# Altium PCB the89C52-PCB-Designer_4.8-Gakenn.PcbDoc
Units mil, origin at the board's own origin, x right, y up, seen from the top; angles counter-clockwise.
Board outline 3936.26 x 3936.26 mil, 2 copper layers (Top Layer, Bottom Layer); 97 components, 95 nets, 373 pads, 50 vias.
Unrouted connection lines stored in the file: 1.
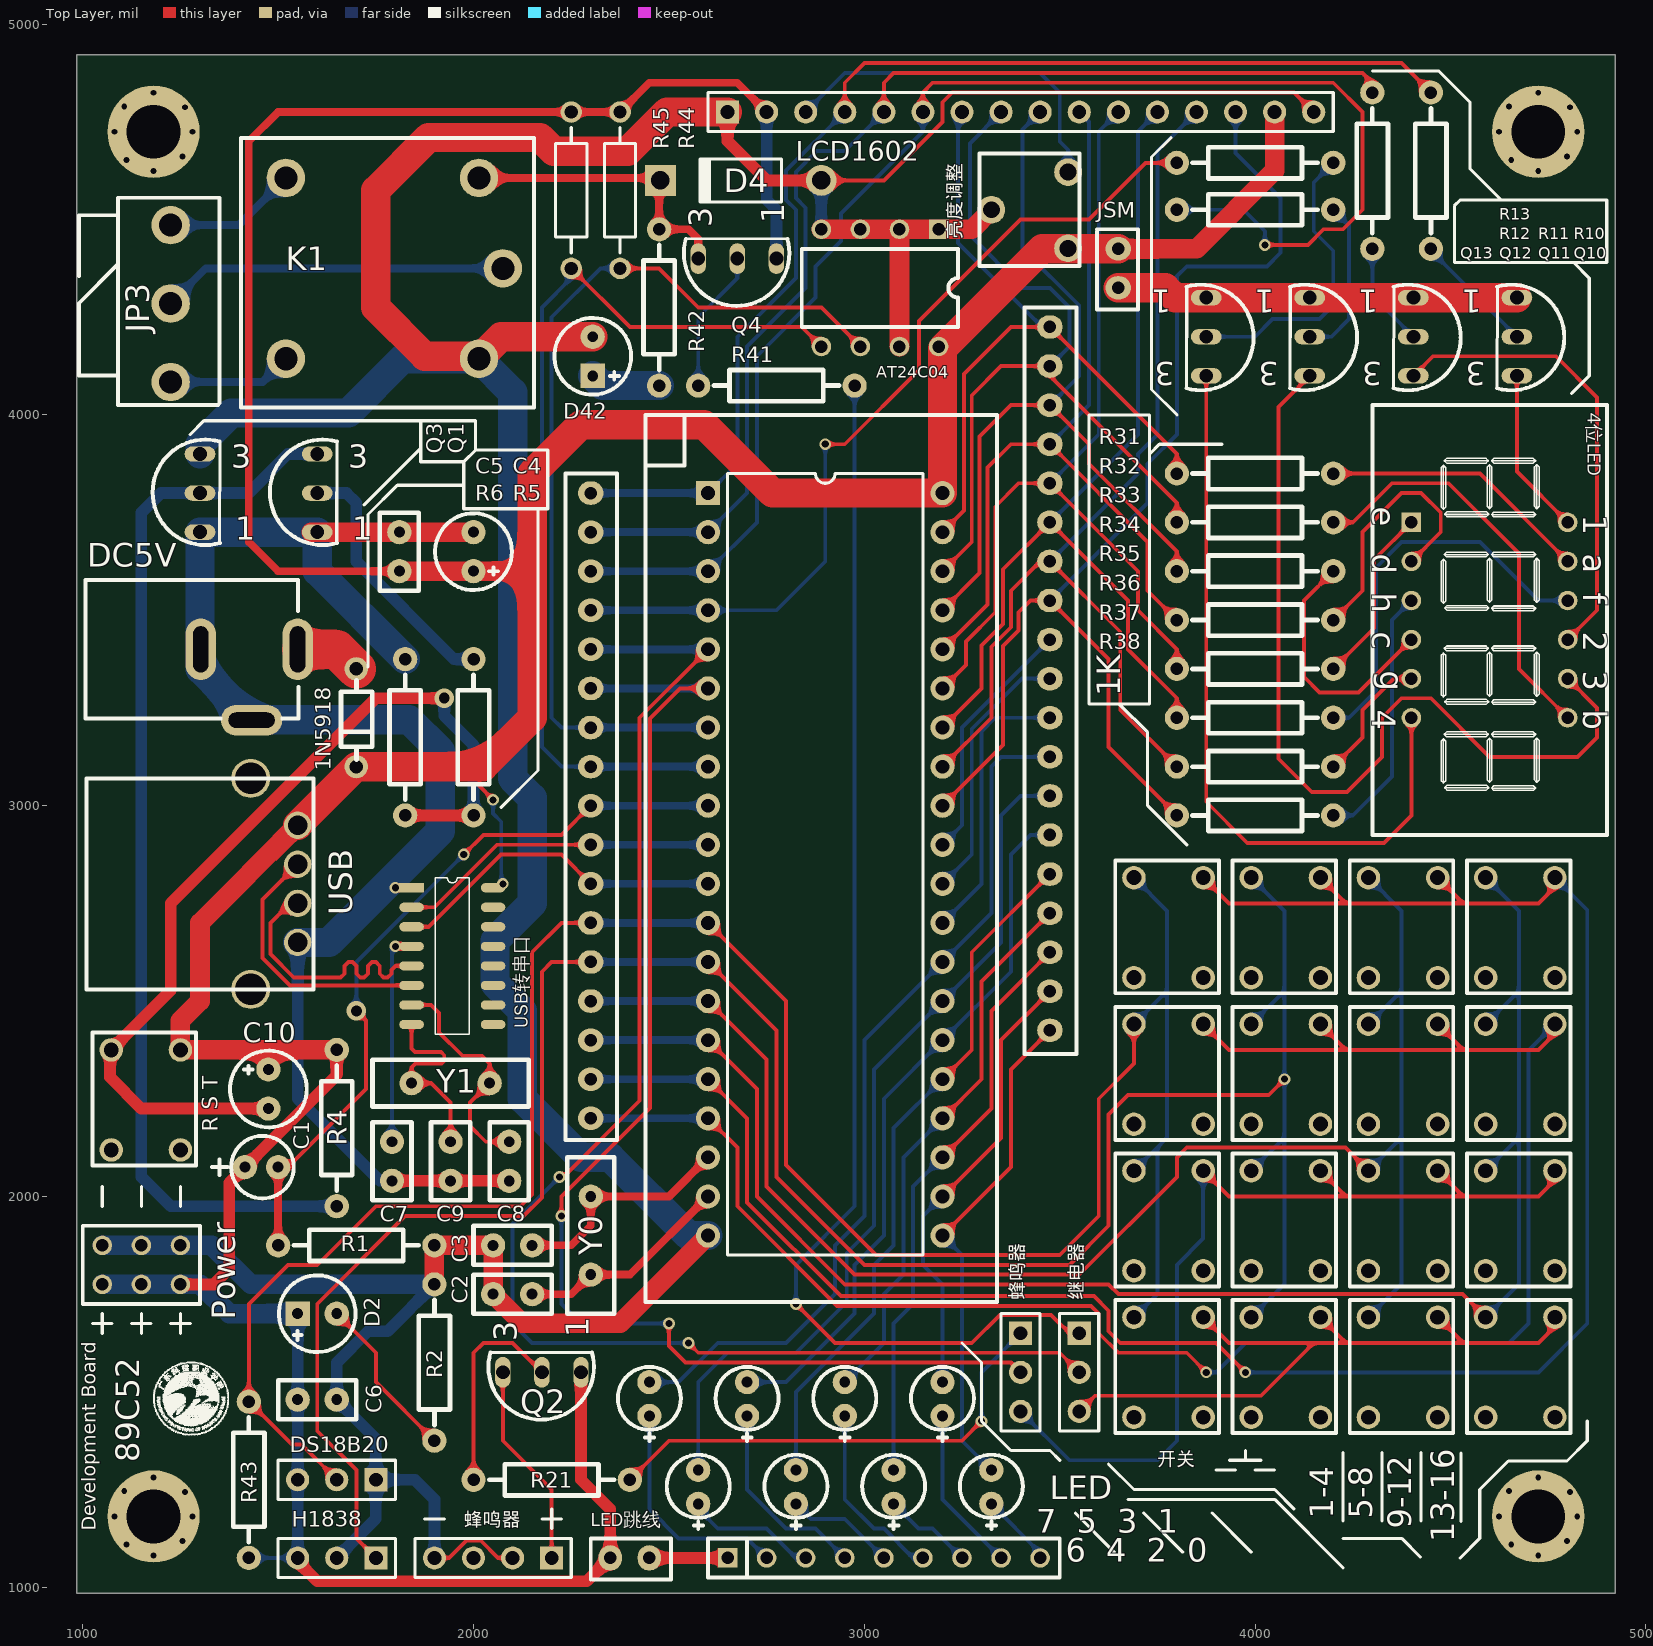
[diagram p0: Top Layer view]
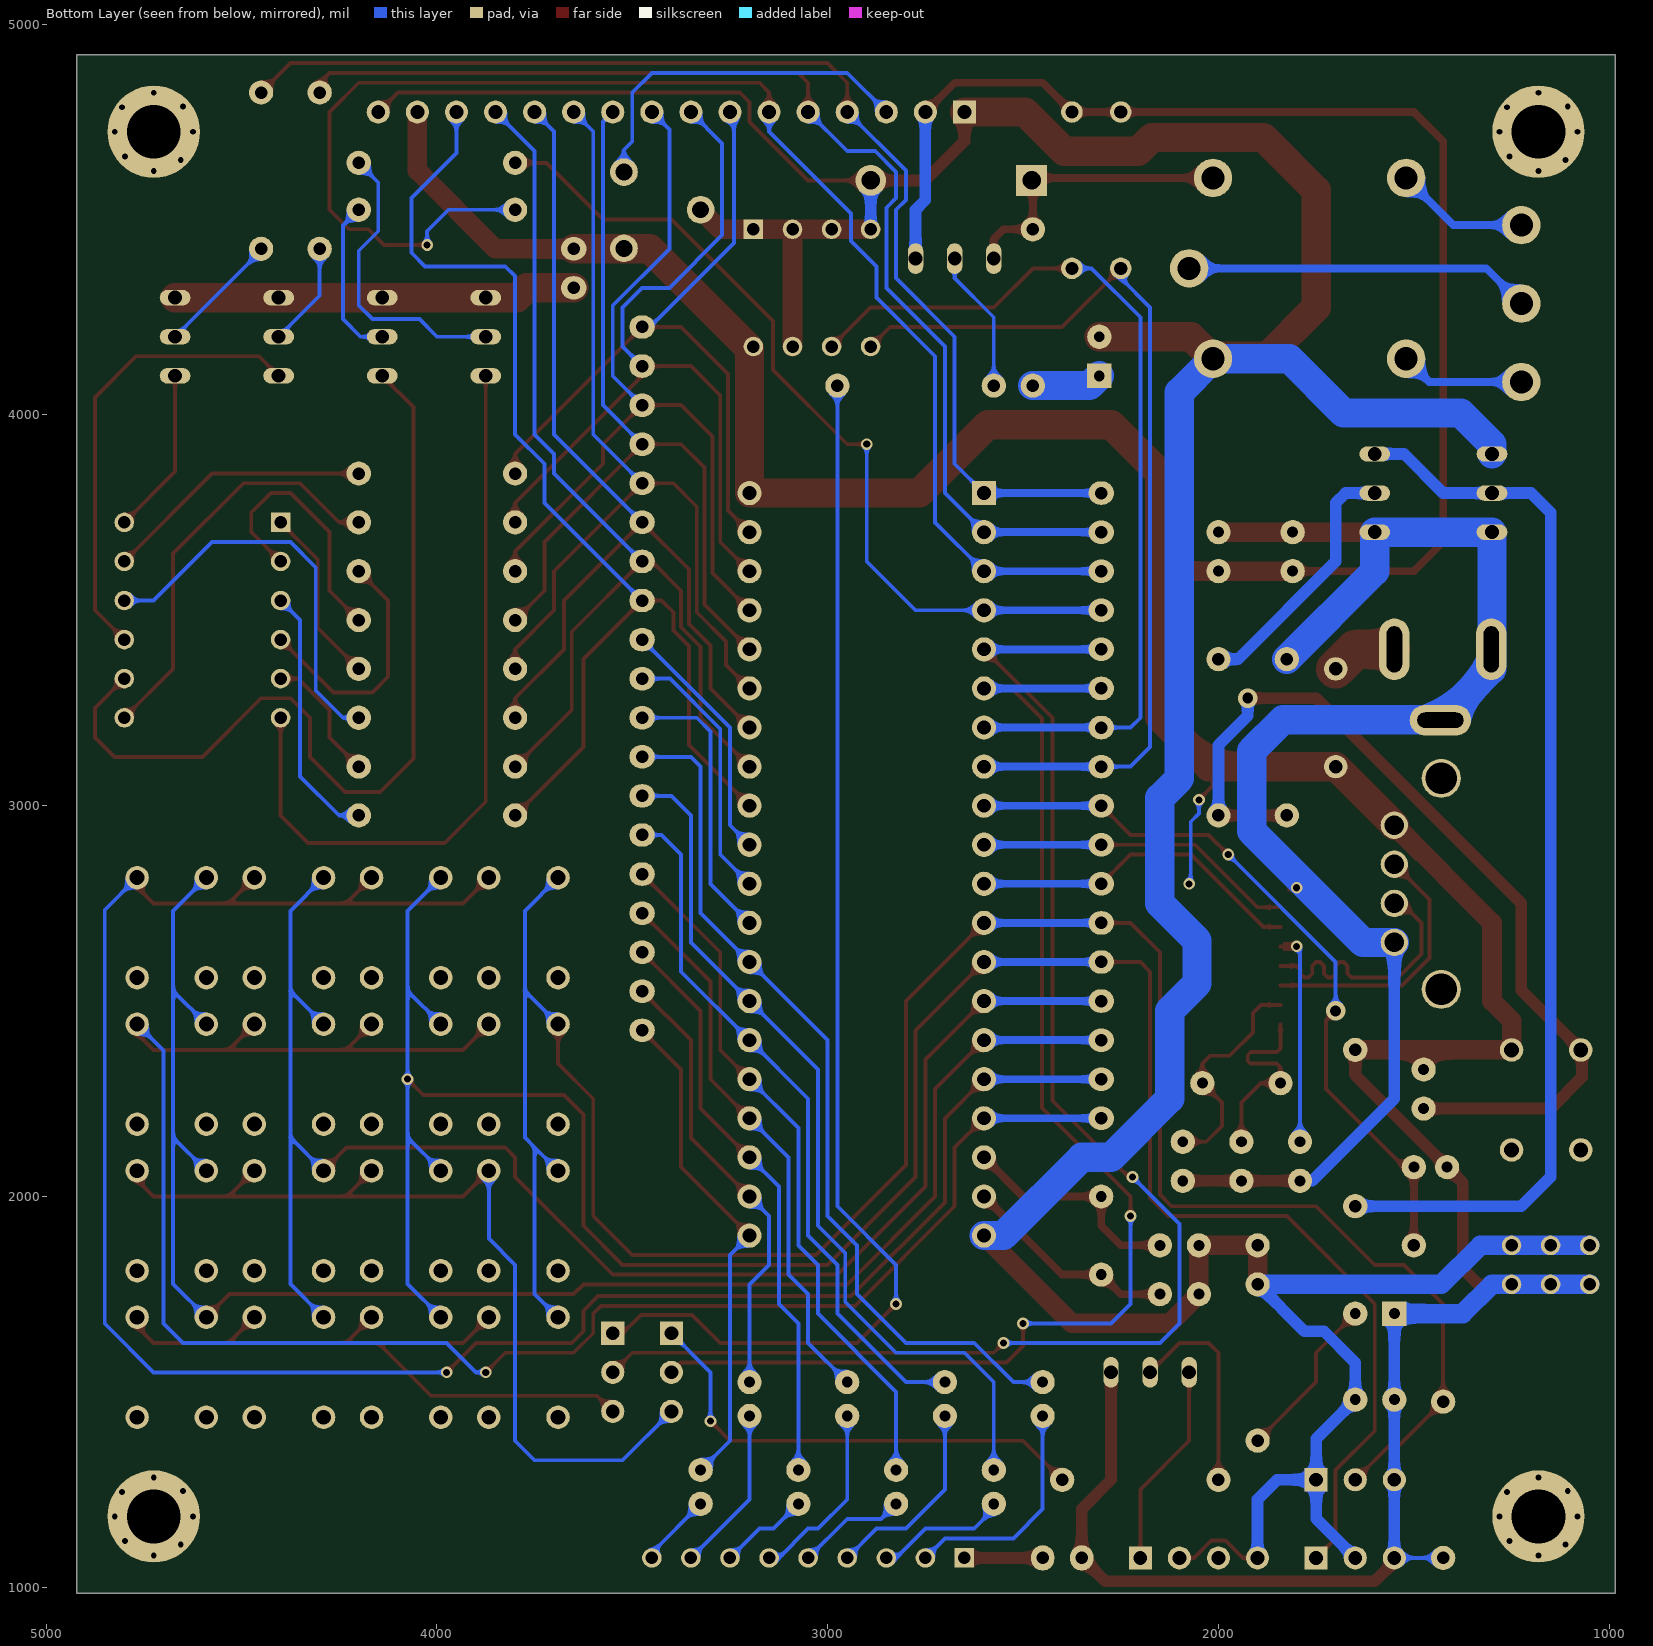
[diagram p1: Bottom Layer view, seen from below]

## Layer stack, top to bottom
Top Solder: solder mask 0.4, Solder Resist, Dk 3.5
Top Layer: signal copper 1.4
Dielectric 1: dielectric 12.6, FR-4, Dk 4.8
Bottom Layer: signal copper 1.4
Bottom Solder: solder mask 0.4, Solder Resist, Dk 3.5

## Board outline
985,985 985,4921.26 4921.26,4921.26 4921.26,985

## Design rules (kind name [scope] priority, off if disabled: settings)
Clearance [All] p1: gap=10 ignorepadtopadclearanceinfootprint=FALSE except(0: Arc-Hole Track-Hole SMDPad-Hole THPad-Hole Via-Hole Fill-Hole Poly-Hole Region-Hole Text-Hole)
PolygonConnect [All] p1: connectstyle=Relief reliefconductorwidth=10 reliefentries=4 polygonreliefangle="90 Angle" airgapwidth=10
RoutingVias [All] p1: holewidth=28 width=50 viastyle="Through Hole" minholewidth=28 minwidth=50 maxholewidth=28 maxwidth=50
SolderMaskExpansion [All] p1: expansion=4
Width [All] p1: maxlimit=10 minlimit=10 preferedwidth=10
30 further rules are at their usual default settings.

## Classes and differential pairs
component class 51单片机24: 1N5918 4λLED AT24C04 C1 C2 C3 C4 C5 C6 C7 C8 C9 C10 D2 D4 D42 DC5V DS18B20 H1838 JP3 JSM K1 LCD1602 LED跳线 Power Q1 Q2 Q3 Q4 Q10 Q11 Q12 Q13 R1 R2 R4 R5 R6 R10 R11 R12 R13 R21 R31 R32 R33 R34 R35 R36 R37 R38 R41 R42 R43 R44 R45 "R S T" RW1 USB USB转串口 Y0 Y1 亮度调整 继电器 蜂鸣器 ""

## Components (designator, comment, footprint, x,y, rotation, side; value= is the part's Value field where it differs from the comment)
1N5918 "1N5918" 4148 1709,3258 r270 top (schematic designator D1)
4位LED "SMG" smg 4630,3490 r270 top (schematic designator SMG1)
AT24C04 "24C04" DIP8 3190,4475 r270 top (schematic designator U2)
C1 "10u" C2 1415,2075 r0 top
C2 "Cap" RAD-0.1 2050,1750 r0 top value=0.1uF
C3 "Cap" RAD-0.1 2050,1875 r0 top value=0.1uF
C4 "100uf" c4 2000,3600 r90 top
C5 "104" RAD-0.1 1810,3600 r90 top
C6 "Cap" RAD-0.1 1650,1480 r180 top value=104
C7 "104" RAD-0.1 1791.34,2140 r270 top
C8 "22P" RAD-0.1 2091.34,2140 r270 top
C9 "22p" RAD-0.1 1941.34,2140 r270 top
C10 "10uF" c4 1475,2325 r270 top
D2 "LED0" LED2 1550,1700 r0 top
D4 "4148" DO-41 2684.09,4600 r180 top
D20 "LED0" LED8 3325,1213.39 r90 top
D21 "LED0" LED8 3200,1438.39 r90 top
D22 "LED0" LED8 3075,1213.39 r90 top
D23 "LED0" LED8 2950,1438.39 r90 top
D24 "LED0" LED8 2825,1213.39 r90 top
D25 "LED0" LED8 2700,1438.39 r90 top
D26 "LED0" LED8 2575,1213.39 r90 top
D27 "LED0" LED8 2450,1438.39 r90 top
D42 "LED0" LED2 2305,4100 r90 top
DC5V "POWER" DC5V-3 1550,3400 r270 top
DS18B20 "DS18B20" HDR1X3 1750,1275 r180 top (schematic designator P4)
H1838 "H1838" HDR1X3 1750,1075 r180 top (schematic designator P5)
JP3 "JP3" JP3 1225,4485.79 r270 top
JSM "JJ" j2 3650,4425 r0 top
K1 "JDQ" JDQ 1519.88,4143.7 r0 top
LCD1602 "Header 16" HDR1X16 2650,4775 r0 top (schematic designator P3)
LED跳线 "JJ" j2 2350,1075 r90 top (schematic designator JLED)
MCU? "U1" S52 2600,3800 r0 top
P0 "P2" j19 3475,4225 r0 top
P1 "Header 17" j17 2300,3800 r0 top
Power "JPW" SIP 1125,1825 r0 top (schematic designator JPW)
PR102 "1K" SIP-9 2650.5,1075.5 r0 top
Q1 "S8050" sanjiguan 1600,3700 r0 top
Q2 "S8550" sanjiguan 2275,1550 r90 top
Q3 "8050" sanjiguan 1300,3700 r0 top
Q4 "S8550" sanjiguan 2775,4400 r90 top
Q10 "S8550" sanjiguan 4670,4300 r180 top
Q11 "S8550" sanjiguan 4405,4300 r180 top
Q12 "S8550" sanjiguan 4140,4300 r180 top
Q13 "S8550" sanjiguan 3875,4300 r180 top
R1 "10K" axial0.4 1900,1875 r180 top
R2 "1K" axial0.4 1900,1775 r270 top
R4 "1K" axial0.4 1650,1975 r90 top
R5 "1K" axial0.4 2000,2975 r90 top
R6 "10K" axial0.4 1825,2975 r90 top
R10 "5.1K" axial0.4 4450,4425 r90 top
R11 "5.1K" axial0.4 4300,4425 r90 top
R12 "5.1K" axial0.4 4200,4525 r180 top
R13 "5.1K" axial0.4 4200,4645 r180 top
R21 "5.1K" axial0.4 2400,1275 r180 top
R31 "1K" axial0.4 3800,3850 r0 top
R32 "1K" axial0.4 3800,3725 r0 top
R33 "1K" axial0.4 3800,3600 r0 top
R34 "1K" axial0.4 3800,3475 r0 top
R35 "1K" axial0.4 3800,3350 r0 top
R36 "1K" axial0.4 3800,3225 r0 top
R37 "1K" axial0.4 3800,3100 r0 top
R38 "1K" axial0.4 3800,2975 r0 top
R41 "5.1K" axial0.4 2975,4075 r180 top
R42 "1K" axial0.4 2475,4075 r90 top
R43 "5.1k" axial0.4 1425,1475 r270 top
R44 "5.1K" AXIAL-0.4 2375,4575 r90 top
R45 "5.1K" AXIAL-0.4 2250,4575 r90 top
"R S T" "RET" sw 1250,2119.09 r90 top (schematic designator RET1)
S1 "RET" sw 3867.17,1435 r90 top
S2 "RET" sw 3867.17,1810 r90 top
S3 "RET" sw 3867.17,2185 r90 top
S4 "RET" sw 3867.17,2560 r90 top
S5 "RET" sw 4167.17,1435 r90 top
S6 "RET" sw 4167.17,1810 r90 top
S7 "SW-PB" SW 4167.17,2185 r90 top
S8 "SW-PB" SW 4167.17,2560 r90 top
S9 "SW-PB" SW 4467.17,1435 r90 top
S10 "SW-PB" SW 4467.17,1810 r90 top
S11 "SW-PB" SW 4467.17,2185 r90 top
S12 "SW-PB" SW 4467.17,2560 r90 top
S13 "SW-PB" SW 4767.17,1435 r90 top
S14 "SW-PB" SW 4767.17,1810 r90 top
S15 "SW-PB" SW 4767.17,2185 r90 top
S16 "SW-PB" SW 4767.17,2560 r90 top
USB "CON4" USB 1550,2950 r90 top
USB转串口 "CH340G-16" "SOP-16 - duplicate" 1841.34,2790 r0 top (schematic designator U3)
Y0 "11.0592" XTAL1 2300,1800 r90 top
Y1 "12MHz" XTAL1 2041.34,2290 r180 top
亮度调整 "Res Tap" RW 3295,4381.3 r90 top value=10K (schematic designator RW1)
继电器 "SW/JDQ" HDR1X3 3550,1650 r270 top (schematic designator P6)
蜂鸣器 "Speaker" HDR1X4 2200,1075 r180 top (schematic designator SPK)
蜂鸣器 "SW/SPK" HDR1X3 3400,1650 r270 top (schematic designator P7)
? "Comment" gudingkong 4724.41,4724.41 r0 top
? "Comment" gudingkong 4724.41,1181.1 r0 top
? "Comment" gudingkong 1181.1,1181.1 r0 top
? "Comment" gudingkong 1181.1,4724.41 r0 top

## Footprints (in the part's own frame and the unit in brackets; to place one, negate y for a bottom-side part, rotate by r counter-clockwise, add the part's x,y. Pads: shape width x height; smd on the part's side, far side on the other; paste and mask are expansions set on the pad)
4148 [mil]
  round 60 hole 35: 1(-92,-9) 2(158,-9)
  silkscreen extent -63,-48 141,32
axial0.4 [mil]
  round 62 hole 32: 1(0,0) 2(400,0)
  silkscreen extent 40,-40 360,40
AXIAL-0.4 [mm] "Axial Device, Thru-Hole; 2 Leads; 0.4 in Pin Spacing"
  round 1.4 hole 0.85: 1(-5.08,0) 2(5.08,0)
  silkscreen extent -4.06,-1.02 4.06,1.02
C2 [mil]
  round 62 hole 28: 1(0,0) 2(85,0)
  silkscreen extent -85,-80 125,80
c4 [mil]
  round 62 hole 28: 1(0,0) 2(100,0)
  silkscreen extent -48,-98 148,98
DC5V-3 [mm]
  oval 4x2 hole 1 slot 3 at 0 deg: 1(0,0) 2(0,-6.3)
  oval 2x4 hole 1 slot 3 at 90 deg: 3(4.6,-3)
  silkscreen extent -4.5,-13.8 4.5,0.04
DIP8 [mil]
  rect 50x50 hole 32: 1(0,0)
  round 50 hole 32: 2(0,-100) 3(0,-200) 4(0,-300) 5(300,-300) 6(300,-200) 7(300,-100) 8(300,0)
  silkscreen extent 50,-350 250,50
DO-41 [mm] "Diode, Axial; Body 5.2 x 2.7 mm (LxDia. max), Lead Dia. 0.86 mm (max)"
  round 2 hole 1.2: 1(-5.23,0)
  rect 2x2 hole 1.2: 2(5.23,0)
  silkscreen extent -2.65,-1.4 2.75,1.4
gudingkong [mm]
  round 6 hole 3.5: 0(0,0)
HDR1X3 [mm] "Connector; Header; 3 Position"
  rect 1.5x1.5 hole 0.9: 1(0,0)
  round 1.5 hole 0.9: 2(2.54,0) 3(5.08,0)
  silkscreen extent -1.27,-1.27 6.35,1.27
HDR1X4 [mm] "Connector; Header; 4 Position"
  rect 1.5x1.5 hole 0.9: 1(0,0)
  round 1.5 hole 0.9: 2(2.54,0) 3(5.08,0) 4(7.62,0)
  silkscreen extent -1.27,-1.27 8.89,1.27
HDR1X16 [mm] "Connector; Header; 16 Position"
  rect 1.5x1.5 hole 0.9: 1(0,0)
  round 1.5 hole 0.9: 2(2.54,0) 3(5.08,0) 4(7.62,0) 5(10.16,0) 6(12.7,0) 7(15.24,0) 8(17.78,0) 9(20.32,0) 10(22.86,0) 11(25.4,0) 12(27.94,0) 13(30.48,0) 14(33.02,0) 15(35.56,0) 16(38.1,0)
  silkscreen extent -1.27,-1.27 39.37,1.27
j2 [mil]
  oval 65x60 hole 32: 1(0,0) 2(0,-100)
  silkscreen extent -55,-155 50,50
j17 [mil]
  oval 65x60 hole 32: 1(0,0) 2(0,-100) 3(0,-200) 4(0,-300) 5(0,-400) 6(0,-500) 7(0,-600) 8(0,-700) 9(0,-800) 10(0,-900) 11(0,-1000) 12(0,-1100) 13(0,-1200) 14(0,-1300) 15(0,-1400) 16(0,-1500) 17(0,-1600)
  silkscreen extent -65,-1655 68,50
j19 [mil]
  oval 65x60 hole 32: 1(0,0) 2(0,-100) 3(0,-200) 4(0,-300) 5(0,-400) 6(0,-500) 7(0,-600) 8(0,-700) 9(0,-800) 10(0,-900) 11(0,-1000) 12(0,-1100) 13(0,-1200) 14(0,-1300) 15(0,-1400) 16(0,-1500) 17(0,-1600) 18(0,-1700) 19(0,-1800)
  silkscreen extent -65,-1860 68,50
JDQ [mm]
  round 2.5 hole 1.5: 1(0,0) 2(0,11.75) 3(12.55,11.75) 4(14.1,5.875) 5(12.55,0)
  silkscreen extent -2.92,-3.17 16.13,14.35
JP3 [mm]
  round 2.5 hole 1.5: 1(0,0) 2(5.1,0) 3(10.2,0)
  silkscreen extent -1.78,-5.97 11.68,3.18
LED2 [mil]
  rect 62x62 hole 28: 1(0,0)
  round 62 hole 28: 2(100,0)
  silkscreen extent -48,-98 148,98
LED8 [mil]
  round 62 hole 28: 1(0,0) 2(86.61,0)
  silkscreen extent -64,-81 126,81
RAD-0.1 [mil]
  round 62 hole 28: 1(0,0) 2(100,0)
  silkscreen extent -50,-50 150,50
RW [mm]
  round 1.8 hole 1.1: 1(3.65,-0.762) 2(1.143,-5.75) 3(6.096,-5.75)
  silkscreen extent 0,-6.5 7.3,0
S52 [mil]
  rect 62x62 hole 35: 1(0,0)
  round 62 hole 35: 2(0,-100) 3(0,-200) 4(0,-300) 5(0,-400) 6(0,-500) 7(0,-600) 8(0,-700) 9(0,-800) 10(0,-900) 11(0,-1000) 12(0,-1100) 13(0,-1200) 14(0,-1300) 15(0,-1400) 16(0,-1500) 17(0,-1600) 18(0,-1700) 19(0,-1800) 20(0,-1900) 21(600,-1900) 22(600,-1800) 23(600,-1700) 24(600,-1600) 25(600,-1500) 26(600,-1400) 27(600,-1300) 28(600,-1200) 29(600,-1100) 30(600,-1000) 31(600,-900) 32(600,-800) 33(600,-700) 34(600,-600) 35(600,-500) 36(600,-400) 37(600,-300) 38(600,-200) 39(600,-100) 40(600,0)
  silkscreen extent -160,-2070 740,200
sanjiguan [mm]
  oval 2x1 hole 0.9: 1(0,0) 2(0,2.54) 3(0,5.08)
  silkscreen extent -3.08,-0.84 1.29,6.02
SIP [mil]
  round 50 hole 32: 1(-75,50) 2(25,50) 3(125,50) 4(-75,-50) 5(25,-50) 6(125,-50)
  silkscreen extent -125,-100 175,100
SIP-9 [mil]
  rect 50x50 hole 32: 1(-0.5,-0.5)
  round 50 hole 32: 2(99.5,-0.5) 3(199.5,-0.5) 4(299.5,-0.5) 5(399.5,-0.5) 6(499.5,-0.5) 7(599.5,-0.5) 8(699.5,-0.5) 9(799.5,-0.5)
  silkscreen extent -50,-50 850,50
smg [mil]
  rect 50x50 hole 32: 1(-235,-230)
  round 50 hole 32: 2(-135,-230) 3(-35,-230) 4(65,-230) 5(165,-230) 6(265,-230) 7(265,170) 8(165,170) 9(65,170) 10(-35,170) 11(-135,170) 12(-235,170)
  silkscreen extent -535,-330 565,270
"SOP-16 - duplicate" [mm]
  rect 1.6x0.6 smd: 1(0,0)
  oval 1.6x0.6 smd: 2(0,-1.27) 3(0,-2.54) 4(0,-3.81) 5(0,-5.08) 6(0,-6.35) 7(0,-7.62) 8(0,-8.89) 9(5.3,-8.89) 10(5.3,-7.62) 11(5.3,-6.35) 12(5.3,-5.08) 13(5.3,-3.81) 14(5.3,-2.54) 15(5.3,-1.27) 16(5.3,0)
  silkscreen extent 1.53,-9.53 3.77,0.64
sw [mil]
  round 60 hole 38: 1(255.91,177.17) 2(255.91,0) 3(0,0) 4(0,177.17)
  silkscreen extent -40,-40 300,225
SW [mil]
  round 60 hole 38: 1(255.91,177.17) 2(255.91,0) 3(0,0) 4(0,177.17)
  silkscreen extent -40,-40 300,225
USB [mil]
  round 70 hole 50: 1(0,0) 2(-100,0) 3(-200,0) 4(-300,0)
  round 100 hole 80: ""(-420,120) ""(120,120)
  silkscreen extent -420,-40 120,540
XTAL1 [mil]
  round 62 hole 28: 1(0,0) 2(200,0)
  silkscreen extent -100,-60 300,60

## Part data
1N5918: library part "Diode 1N5408", "3 Amp Medium Power Silicon Rectifier Diode", ComponentLink1Description="Manufacturer Link", ComponentLink1URL=http://www.irf.com/, DatasheetDocument=Aug-1984, LatestRevisionDate=17-Jul-2002, LatestRevisionNote="Re-released for DXP Platform.", PackageReference=DO-201AD, Published=8-Jun-2000, Publisher="Altium Limited"
C1 C4 C10: library part "CAPACITOR POL", "Capacitor"
C2 C3: "Capacitor", Manufacturer="Generic Components", Class=Passive, Published=08/06/2000, Publisher="Altium Hobart Technology Centre", SubClass=Capacitor
C5: library part CAP, "Capacitor"
C6: "Capacitor", LatestRevisionDate=17-Jul-2002, LatestRevisionNote="Re-released for DXP Platform.", PackageReference=RAD-0.3, Published=8-Jun-2000, Publisher="Altium Limited"
C7 C8 C9: library part Cap, "Capacitor"
D2 D20 D21 D22 D23 D24 D25 D26 D27 D42: "Typical INFRARED GaAs LED", LatestRevisionDate=08-Jul-2005, LatestRevisionNote="Mech Layer 1 removed.", PackageReference=LED-0, Published=8-Jun-2000, Publisher="Altium Limited"
D4: library part "Diode 1N4001", "1 Amp General Purpose Rectifier", PackageDocument=Aug-1999, Code_JEDEC=DO-204-AL, ComponentLink1Description="Manufacturer Link", ComponentLink1URL=http://www.fairchildsemi.com/, ComponentLink2Description=Datasheet, ComponentLink2URL=http://www.fairchildsemi.com/ds/1N%2F1N4001.pdf, DatasheetDocument=1998, LatestRevisionDate=17-Jul-2002, LatestRevisionNote="Re-released for DXP Platform.", PackageReference=DO-41, Published=8-Jun-2000, Publisher="Altium Limited"
DC5V DS18B20 H1838 继电器 蜂鸣器: library part "Header 3", "Header, 3-Pin", LatestRevisionDate=17-Jul-2002, LatestRevisionNote="Re-released for DXP Platform.", Publisher="Altium Limited"
LCD1602: "Header, 16-Pin", LatestRevisionDate=17-Jul-2002, LatestRevisionNote="Re-released for DXP Platform.", Publisher="Altium Limited"
MCU?: library part 89C51
P0: library part "Header 19", "Header, 19-Pin", LatestRevisionDate=17-Jul-2002, LatestRevisionNote="Re-released for DXP Platform.", Publisher="Altium Limited"
P1: "Header, 17-Pin", LatestRevisionDate=17-Jul-2002, LatestRevisionNote="Re-released for DXP Platform.", Publisher="Altium Limited"
PR102: library part CON9, "Connector"
Q1 Q3: library part 2N3904, "NPN General Purpose Amplifier", ComponentLink1Description="Manufacturer Link", ComponentLink1URL=http://www.fairchildsemi.com/, ComponentLink2Description=Datasheet, ComponentLink2URL=http://www.fairchildsemi.com/ds/2N%2F2N3904.pdf, DatasheetVersion=1997, LatestRevisionDate=15-Jan-2003, LatestRevisionNote="PCB Footprint 'BCY-W3/D4.7' replaced", PackageDescription="TO, Flat Index; 3 In-Line, Axial Leads; Body Dia. 4.5mm; Leads 0.51 x 0.48 mm (max)", PackageReference=TO-92A, PackageVersion=Sep-1998, Published=8-Jun-2000, Publisher="Altium Limited"
Q2 Q4 Q10 Q11 Q12 Q13: library part 2N3906, "PNP General Purpose Amplifier", PackageDocument=Sep-1998, Code_JEDEC=TO-92A, ComponentLink1Description="Manufacturer Link", ComponentLink1URL=http://www.fairchildsemi.com/, ComponentLink2Description=Datasheet, ComponentLink2URL=http://www.fairchildsemi.com/ds/2N%2F2N3906.pdf, DatasheetDocument=1997, LatestRevisionDate=15-Jan-2003, LatestRevisionNote="PCB Footprint 'BCY-W3/D4.7' replaced", PackageReference=TO-92A, Published=8-Jun-2000, Publisher="Altium Limited"
R1 R4 R5 R6 R10 R11 R12 R13 R21 R31 R32 R33 R34 R35 R36 R37 R38 R41 R42 R43: library part Res2
R2: library part RES2
R44 R45: library part Res2, "Resistor", LatestRevisionDate=17-Jul-2002, LatestRevisionNote="Re-released for DXP Platform.", PackageReference=AXIAL-0.4, Published=8-Jun-2000, Publisher="Altium Limited"
"R S T" S1 S2 S3 S4 S5 S6: library part SW-PB
S7 S8 S9 S10 S11 S12 S13 S14 S15 S16: "Switch", LatestRevisionDate=17-Jul-2002, LatestRevisionNote="Re-released for DXP Platform.", PackageReference=SPST-2, Published=24-Mar-1999, Publisher="Altium Limited"
USB: "Connector"
Y0: library part CRYSTAL, "Crystal"
Y1: library part XTAL, "Crystal Oscillator", LatestRevisionDate=17-Jul-2002, LatestRevisionNote="Re-released for DXP Platform.", PackageReference=R38, Published=8-Jun-2000, Publisher="Altium Limited"
亮度调整: "Tapped Resistor", LatestRevisionDate=17-Jul-2002, LatestRevisionNote="Re-released for DXP Platform.", PackageReference=VR3, Published=24-Mar-1999, Publisher="Altium Limited", Set Position=0.5, Sim Note="Enter the Resistance value and the set point into parameter fields."

## Via types
v1: diameter 30, hole 15, Top Layer to Bottom Layer, 32 vias
v2: diameter 30, hole 18, Top Layer to Bottom Layer, 16 vias
v3: diameter 50, hole 28, Top Layer to Bottom Layer, 2 vias

## Nets (pads, with @x,y where several pads share a name; then routed paths per layer and width w, separated by ;. In a path a pad name is that pad's centre, name@x,y a point inside that pad or via, vN(x,y) a via of type N, cw(c..) or ccw(c..) an arc to the next point about the centre after c; other vN are vias at no path point)
3V3: C7.1 USB转串口.4 | length 544.9
  Top Layer w10: v2(1800,2640) USB转串口.4
  Bottom Layer w10: C7.1 1791.34,2631.34 v2(1800,2640)
5V: 
ALE: MCU?.30 P0.10 | length 680.9
  Bottom Layer w10: MCU?.30 3275,2875 3275,3196.72 3403.28,3325 P0.10
DGND: AT24C04.1 AT24C04.2 AT24C04.3 AT24C04.4 AT24C04.7 C2.1 C3.1 C6.1 D4.1 D42.2 DS18B20.1 H1838.2 K1.5 LCD1602.1 LCD1602.16 MCU?.20 Power.1 Power.2 Power.3 Q3.3 R1.1 R2.1 亮度调整.1 蜂鸣器.2@2100,1075 蜂鸣器.4 | length 11461.6
  Top Layer w10: 蜂鸣器.4 1937.03,1075 1981.56,1119.53 2018.44,1119.53 2062.97,1075 蜂鸣器.2@2100,1075 ; D4.1 3050,4600 3200,4750 3200,4800 3225,4825 4100,4825 LCD1602.16
  Top Layer w30: LCD1602.1 2650,4700 2750,4600 D4.1
  Top Layer w50: R2.1 R1.1 C3.1 C2.1 2125,1675 2375,1675 MCU?.20 ; AT24C04.4 AT24C04.3 AT24C04.2 ; AT24C04.7 AT24C04.2 ; 亮度调整.1 3275,4475 AT24C04.1 AT24C04.2
  Top Layer w75: D42.2 2070.28,4200 2020.28,4150 1875,4150 1750,4275 1750,4575 1885,4710 2170,4710 2205,4675 2395,4675 2495,4775 LCD1602.1
  Bottom Layer w30: H1838.2 1750,1175 DS18B20.1 ; 蜂鸣器.4 1900,1225 1850,1275 DS18B20.1 ; R2.1 1780,1655 1730,1655 1650,1575 C6.1 1750,1380 DS18B20.1 ; AT24C04.4 D4.1
  Bottom Layer w50: Power.1 Power.2 Power.3 1330,1875 1430,1775 R2.1
  Bottom Layer w75: Q3.3 1300,3925 1380,4005 1680,4005 1818.7,4143.7 K1.5 2100,4057.68 2100,3070 2150,3020 2150,2750 2055,2655 2055,2545 2125,2475 2125,2250 2275,2100 2350,2100 2550,1900 MCU?.20
F1: S1.2 S5.2 S9.2 S13.2 继电器.3 | length 1827.4
  Top Layer w10: 继电器.3 3590,1490 4015,1490 4150,1625 ; S1.2 3933.07,1625 4150,1625 ; S5.2 4233.07,1625 ; S9.2 4533.07,1625 ; S13.2 4767.17,1667.17 4725,1625 4533.07,1625 ; 4150,1625 4233.07,1625 ; 4233.07,1625 4533.07,1625
F2: S2.2 S6.2 S10.2 S14.2 蜂鸣器.3@3400,1450 | length 2346.1
  Top Layer w10: S2.2 3933.07,2000 4233.07,2000 ; S6.2 4233.07,2000 ; S10.2 4533.07,2000 ; S14.2 4767.17,2042.17 4725,2000 4533.07,2000 ; 4233.07,2000 4533.07,2000
  Bottom Layer w10: 蜂鸣器.3@3400,1450 3525,1325 3750,1325 3800,1375 3800,1825 3867.17,1892.17 S2.2
G: 
GND: C4.2 C5.2 C7.2 C8.2 C9.2 DC5V.2 DC5V.3 Q1.1 Q3.1 R6.2 USB.4 USB转串口.1 | length 3951.5
  Top Layer w30: C7.2 C9.2 C8.2
  Top Layer w50: Q1.1@1585,3700 Q1.1 C5.2 C4.2
  Bottom Layer w10: DC5V.2@1301.97,3348.82 DC5V.2
  Bottom Layer w30: USB.4 1550,2250 1760,2040 C7.2
  Bottom Layer w75: DC5V.2@1300,3348.82 Q3.1 Q1.1 1600,3600 R6.2 ; DC5V.2@1301.97,3348.82 1430.79,3220 1835,3220 1915,3140 1915,2935 1630,2650 USB.4
  other v2: 1800,2790
JDQ: R41.1 继电器.1 | length 3227.8
  Top Layer w10: v2(2825,1725) 2925,1625 3275,1625 3346.9,1696.9 3478.1,1696.9 3525,1650 继电器.1
  Bottom Layer w10: v2(2825,1725) 2825,1825 2975,1975 R41.1
NetC2_2: C2.2 MCU?.19 Y0.1 | length 553.6
  Top Layer w20: C2.2 2250,1750 Y0.1 2400,1800 MCU?.19
NetC3_2: C3.2 MCU?.18 Y0.2 | length 592.1
  Top Layer w20: C3.2@2145,1885 C3.2@2150,1885 ; C3.2 2250,1875 2300,1925 Y0.2 2500,2000 MCU?.18
NetC8_1: C8.1 USB转串口.7 Y1.1 | length 588.7
  Top Layer w10: USB转串口.7 1891.34,2490 1911.34,2470 1911.34,2420 1971.34,2360 2021.34,2360 2041.34,2340 Y1.1 1991.34,2240 1991.34,2180 2031.34,2140 C8.1
NetC9_1: C9.1 USB转串口.8 Y1.2 | length 518.3
  Top Layer w10: USB转串口.8 1841.34,2378.66 1850,2370 1916.34,2370 1925,2361.34 1925,2346.34 1918.66,2340 1851.34,2340 1841.34,2330 Y1.2 1891.34,2290 1941.34,2240 C9.1
NetC10_2: "R S T.1" C10.2 R5.1 R6.1 | length 2370.9
  Top Layer w30: C10.2 1150,2225 1070,2305 1070,2372.17 1072.83,2375 1225,2527.17 1225,2750 1750,3275 v3(1925,3275) ; R6.1 R5.1
  Bottom Layer w30: v3(1925,3275) 1925,3230 2000,3155 R5.1
NetD1_1: 1N5918.1 DC5V.1 | length 160.7
  Top Layer w100: DC5V.1@1560,3400 1650,3400 1N5918.1
NetD2_2: D2.2 R2.2 | length 428.6
  Top Layer w10: D2.2 1750,1600 1750,1525 R2.2
NetD4_2: D4.2 K1.3 Q4.3 R42.2 | length 752.2
  Top Layer w10: D4.2@2471.89,4606.3 D4.2
  Top Layer w20: K1.3 D4.2@2471.89,4606.3 ; D4.2@2475,4600 R42.2 2550,4475 2575,4450 Q4.3
NetD20_1: D20.1 PR102.9 | length 190.2
  Bottom Layer w10: D20.1 3450,1088.39 PR102.9
NetD21_1: D21.1 PR102.8 | length 425.5
  Bottom Layer w10: D21.1 3200,1225 PR102.8
NetD22_1: D22.1 PR102.7 | length 232.3
  Bottom Layer w10: D22.1 3138.39,1150 3175,1150 PR102.7
NetD23_1: D23.1 PR102.6 | length 475.5
  Bottom Layer w10: D23.1 2950,1225 3025,1150 3050,1150 3125,1075 PR102.6
NetD24_1: D24.1 PR102.5 | length 282.3
  Bottom Layer w10: D24.1 2863.39,1175 2950,1175 PR102.5
NetD25_1: D25.1 PR102.4 | length 510.9
  Bottom Layer w10: D25.1 2700,1250 2800,1150 2875,1150 PR102.4
NetD26_1: D26.1 PR102.3 | length 340.2
  Bottom Layer w10: D26.1 2575,1200 2625,1150 2750,1150 2825,1075 PR102.3
NetD27_1: D27.1 PR102.2 | length 590.2
  Bottom Layer w10: D27.1 2450,1200 2525,1125 2700,1125 PR102.2
NetD42_1: D42.1 R42.1 | length 180.4
  Bottom Layer w75: D42.1 2330,4075 R42.1
NetJLED_2: LED跳线.2 PR102.1 | length 200
  Top Layer w30: LED跳线.2 PR102.1
NetJP3_1: JP3.1 K1.2 | length 344.8
  Bottom Layer w20: JP3.1 1399.37,4485.79 K1.2
NetJP3_2: JP3.2 K1.4 | length 887.3
  Bottom Layer w20: JP3.2 1315,4375 K1.4
NetJP3_3: JP3.3 K1.1 | length 319.5
  Bottom Layer w20: JP3.3 1460.39,4084.21 K1.1
NetJSM_2: JSM.2 Q10.1 Q11.1 Q12.1 Q13.1 | length 1030.4
  Top Layer w75: JSM.2 3770,4325 3795,4300 Q13.1 Q12.1 Q11.1 Q10.1
NetP3_3: LCD1602.3 亮度调整.3 | length 924.7
  Bottom Layer w10: LCD1602.3 2950,4875 3450,4875 3500,4825 3500,4700 3521.38,4678.62 亮度调整.3
NetQ1_2: Q1.2 R5.2 | length 663.9
  Bottom Layer w30: Q1.2 1675,3800 1700,3775 1700,3625 1950,3375 R5.2
NetQ1_3: Q1.3 Q3.2 R4.1 | length 2743.2
  Bottom Layer w30: Q1.3 1525,3900 1425,3800 Q3.2 1200,3800 1150,3750 1150,2050 1225,1975 R4.1
NetQ2_2: Q2.2 R21.2 | length 541.4
  Top Layer w10: R21.2 2000,1600 2025,1625 2100,1625 Q2.2
NetQ2_3: Q2.3 蜂鸣器.1@2200,1075 | length 526.8
  Top Layer w10: Q2.3 2075,1375 2200,1250 蜂鸣器.1@2200,1075
NetQ4_2: Q4.2 R41.2 | length 366.4
  Bottom Layer w10: R41.2 2575,4250 2675,4350 Q4.2
NetQ5_2: 
NetQ5_3: 
NetQ10_2: Q10.2 R10.1 | length 316.1
  Bottom Layer w10: R10.1 4450,4420 Q10.2
NetQ10_3: 4位LED.12 Q10.3 | length 428.8
  Top Layer w10: Q10.3 4670,3855 4位LED.12
NetQ11_2: Q11.2 R11.1 | length 268.5
  Bottom Layer w10: R11.1 4300,4305 Q11.2
NetQ11_3: 4位LED.9 Q11.3 | length 1185.3
  Top Layer w10: Q11.3 4455,4150 4770,4150 4875,4045 4875,3500 4位LED.9
NetQ12_2: Q12.2 R12.1 | length 415.2
  Bottom Layer w10: Q12.2 4195,4200 4240,4245 4240,4485 R12.1
NetQ12_3: 4位LED.8 Q12.3 | length 2285.2
  Top Layer w10: Q12.3 4060,4020 4060,3120 4145,3035 4235,3035 4325,3125 4325,3225 4375,3275 4450,3275 4600,3125 4825,3125 4875,3175 4875,3250 4位LED.8
NetQ13_2: Q13.2 R13.1 | length 764.6
  Bottom Layer w10: Q13.2 4000,4200 4045,4245 4165,4245 4200,4280 4200,4420 4150,4470 4150,4595 R13.1
NetQ13_3: 4位LED.6 Q13.3 | length 1937.5
  Top Layer w10: Q13.3 3875,3010 3980,2905 4330,2905 4400,2975 4位LED.6
NetR7_1: 
NetR31_2: 4位LED.11 R31.2 | length 693.2
  Top Layer w10: R31.2 4575,3850 4位LED.11
NetR32_2: 4位LED.7 R32.2 | length 1062.8
  Top Layer w10: R32.2 4250,3725 4350,3825 4495,3825 4675,3645 4675,3350 4位LED.7
NetR33_2: 4位LED.4 R33.2 | length 648.6
  Top Layer w10: R33.2 4125,3525 4125,3330 4165,3290 4265,3290 4位LED.4
NetR34_2: 4位LED.2 R34.2 | length 674.3
  Top Layer w10: R34.2 4275,3550 4275,3700 4375,3800 4425,3800 4475,3750 4475,3700 4位LED.2
NetR35_2: 4位LED.1 R35.2 | length 457.8
  Top Layer w10: R35.2 4305,3455 4305,3630 4位LED.1
NetR36_2: 4位LED.10 R36.2 | length 1033.1
  Bottom Layer w10: R36.2 4240,3225 4310,3295 4310,3610 4375,3675 4575,3675 4725,3525 4位LED.10
NetR37_2: 4位LED.5 R37.2 | length 334.2
  Top Layer w10: R37.2 4275,3175 4275,3245 4355,3325 4位LED.5
NetR38_2: 4位LED.3 R38.2 | length 662.1
  Bottom Layer w10: R38.2 4250,2975 4350,3075 4350,3475 4位LED.3
NetU3_5: USB.3 USB转串口.5 | length 698.3
  Top Layer w10: USB.3@1550,2740 USB.3@1540,2740 ; USB.3 USB.3@1540,2740 ; USB转串口.5 1800,2590 1790,2580 1790,2570 1780,2560 1770,2560 1760,2570 1760,2590 1750,2600 1740,2600 1730,2590 1730,2570 1720,2560 1710,2560 1700,2570 1700,2590 1690,2600 1680,2600 1670,2590 1670,2570 1660,2560 1540,2560 1480,2620 1480,2700 1520,2740 USB.3@1540,2740
NetU3_6: USB.2 USB转串口.6 | length 687.6
  Top Layer w10: USB.2 1460,2760 1460,2610 1530,2540 USB转串口.6
P00: LCD1602.7 MCU?.39 P0.1 R31.1 | length 1895.3
  Top Layer w10: MCU?.39@3225,3700 MCU?.39 3255,3755 3255,4105 3375,4225 P0.1 3800,3900 R31.1
  Bottom Layer w10: LCD1602.7 3240,4765 3240,4440 3455,4225 P0.1
P01: LCD1602.8 MCU?.38 P0.2 R32.1 | length 2097.2
  Top Layer w10: MCU?.38 3275,3675 3275,4050 3350,4125 P0.2 3475,4100 3800,3775 R32.1
  Bottom Layer w10: LCD1602.8 3270,4695 3270,4460 3405,4325 3475,4325 3525,4275 3525,4175 P0.2
P02: LCD1602.9 MCU?.37 P0.3 R33.1 | length 2116.9
  Top Layer w10: MCU?.37 3295,3595 3295,3945 3375,4025 P0.3 3575,3925 3575,3875 3800,3650 R33.1
  Bottom Layer w10: LCD1602.9 3405,4730 3405,4425 3550,4280 3550,4100 P0.3
P03: LCD1602.10 MCU?.36 P0.4 R34.1 | length 2183.9
  Top Layer w10: MCU?.36 3315,3515 3315,3865 3375,3925 P0.4 3725,3675 3725,3550 R34.1
  Bottom Layer w10: P0.4 3575,4025 3575,4750 LCD1602.10
P04: LCD1602.11 MCU?.35 P0.5 R35.1 | length 2317.9
  Top Layer w10: MCU?.35 3260,3360 3260,3420 3335,3495 3335,3765 3395,3825 P0.5 3700,3600 3700,3500 3800,3400 R35.1
  Bottom Layer w10: P0.5 3600,3950 3600,4725 LCD1602.11
P05: LCD1602.12 MCU?.34 P0.6 R36.1 | length 2437.4
  Top Layer w10: MCU?.34 3300,3300 3300,3410 3355,3465 3355,3605 P0.6 3675,3525 3675,3400 3800,3275 R36.1
  Bottom Layer w10: P0.6 3700,3950 3700,4725 LCD1602.12
P06: LCD1602.13 MCU?.33 P0.7 R37.1 | length 2618.5
  Top Layer w10: MCU?.33 3325,3225 3325,3406.72 3375,3456.72 3375,3550 3450,3625 P0.7 3655,3445 3655,3245 R37.1
  Bottom Layer w10: P0.7 3700,3850 3700,3900 3750,3950 3750,4675 LCD1602.13
P07: LCD1602.14 MCU?.32 P0.8 R38.1 | length 3014.9
  Top Layer w10: MCU?.32 3355,3155 3355,3408.43 3395,3448.43 3395,3495 3425,3525 P0.8 3625,3375 3625,3150 R38.1
  Bottom Layer w10: P0.8 3725,3775 3725,3875 3800,3950 3800,4355 3825,4380 4030,4380 4065,4415 4065,4555 3950,4670 LCD1602.14
P10: LCD1602.4 MCU?.1 P1.1 R10.2 | length 3067.5
  Top Layer w10: LCD1602.4 2950,4850 3000,4900 4375,4900 R10.2
  Bottom Layer w10: MCU?.1 2675,3875 2675,4200 2825,4350 2825,4525 2800,4550 2800,4625 LCD1602.4
  Bottom Layer w20: P1.1 MCU?.1
P11: LCD1602.5 MCU?.2 P1.2 R11.2 | length 2994.8
  Top Layer w10: LCD1602.5 3050,4850 3075,4875 4275,4875 4300,4850 R11.2
  Bottom Layer w10: MCU?.2 2700,3800 2700,4175 2850,4325 2850,4530 2825,4555 2825,4621.72 2878.28,4675 2950,4675 LCD1602.5
  Bottom Layer w20: P1.2 MCU?.2
P12: LCD1602.6 MCU?.3 P1.3 R12.2 | length 3739.3
  Top Layer w10: LCD1602.6 3150,4825 3175,4850 4200,4850 4275,4775 4275,4525 4225,4475 4175,4475 4135,4435 v2(4025,4435)
  Bottom Layer w10: MCU?.3 2725,3725 2725,4150 2875,4300 2875,4380 2940,4445 2940,4515 3150,4725 LCD1602.6 ; R12.2 3970,4525 4025,4470 v2(4025,4435)
  Bottom Layer w20: P1.3 MCU?.3
P13: MCU?.4 P1.4 R13.2 | length 2218.2
  Top Layer w10: v2@2905,3925 2950,3925 3140,4115 3140,4240 3400,4500 3575,4500 3720,4645 R13.2
  Bottom Layer w10: MCU?.4 2775,3500 2900,3625 v2(2900,3925)
  Bottom Layer w20: P1.4 MCU?.4
P14: MCU?.5 P1.5 继电器.2 | length 3733.3
  Top Layer w10: v2@2227.5,2047.5 2425,2245 2425,3225 MCU?.5 ; v2(2550,1625) 2575,1600 3500,1600 继电器.2
  Bottom Layer w10: v2(2220,2050) 2100,1930 2100,1675 2150,1625 v2(2550,1625)
  Bottom Layer w20: P1.5 MCU?.5
P15: MCU?.6 P1.6 蜂鸣器.2@3400,1550 | length 3353.6
  Top Layer w10: v2(2225,1950) 2225,2000 2451.64,2226.64 2451.64,3223.36 2528.28,3300 MCU?.6 ; v2(2500,1675) 2500,1617.43 2542.43,1575 3375,1575 蜂鸣器.2@3400,1550
  Bottom Layer w10: v2(2225,1950) 2225,1725 2275,1675 v2(2500,1675)
  Bottom Layer w20: P1.6 MCU?.6
P16: AT24C04.6 MCU?.7 P1.7 R44.1 | length 2360
  Top Layer w10: R44.1 2475,4375 2575,4275 2890,4275 AT24C04.6
  Bottom Layer w10: P1.7 2225,3200 2200,3225 2200,4250 2325,4375 R44.1
  Bottom Layer w20: P1.7 MCU?.7
P17: AT24C04.5 MCU?.8 P1.8 R45.1 | length 2424.6
  Top Layer w10: R45.1 2400,4225 2840,4225 AT24C04.5
  Bottom Layer w10: R45.1 2250,4350 2175,4275 2175,3150 2225,3100 P1.8
  Bottom Layer w20: P1.8 MCU?.8
P20: D20.2 MCU?.21 P0.19 | length 1290.7
  Top Layer w10: MCU?.21 3375,2075 3375,2325 P0.19
  Bottom Layer w10: MCU?.21 3250,1850 3250,1375 D20.2
P21: D21.2 MCU?.22 P0.18 | length 1155.3
  Top Layer w10: MCU?.22 3350,2150 3350,2400 P0.18
  Bottom Layer w10: D21.2 3200,1775 3150,1825 3150,1950 MCU?.22
P22: D22.2 MCU?.23 P0.17 | length 1490.7
  Top Layer w10: MCU?.23 3325,2225 3325,2475 P0.17
  Bottom Layer w10: D22.2 3075,1675 3125,1725 3125,2025 MCU?.23
P23: D23.2 MCU?.24 P0.16 | length 1417.5
  Top Layer w10: MCU?.24 3300,2300 3300,2550 P0.16
  Bottom Layer w10: D23.2 3050,1625 3050,1750 3100,1800 3100,2100 MCU?.24
P24: D24.2 MCU?.25 P0.15 | length 1794.2
  Top Layer w10: MCU?.25 3275,2375 3275,2625 P0.15
  Bottom Layer w10: D24.2 2825,1500 3025,1700 3025,1825 3075,1875 3075,2175 MCU?.25
P25: D25.2 MCU?.26 P0.14 | length 1808.9
  Bottom Layer w10: D25.2 2800,1525 2975,1700 2975,1825 3050,1900 3050,2250 MCU?.26 3375,2575 3375,2875 3425,2925 P0.14
P26: D26.2 MCU?.27 P0.13 | length 2244.2
  Bottom Layer w10: D26.2 2575,1525 2650,1600 2825,1600 2955,1730 2955,1855 3025,1925 3025,2325 MCU?.27 3350,2650 3350,2975 3400,3025 P0.13
P27: D27.2 MCU?.28 P0.12 | length 2244.2
  Bottom Layer w10: D27.2 2525,1525 2625,1625 2800,1625 2925,1750 2925,1875 3000,1950 3000,2400 MCU?.28 3325,2725 3325,3100 3350,3125 P0.12
P30: MCU?.10 P1.10 USB转串口.2 | length 824.9
  Top Layer w10: USB转串口.2 1900,2740 2060,2900 P1.10
  Bottom Layer w20: P1.10 MCU?.10
P31: MCU?.11 P1.11 USB转串口.3 | length 866.4
  Top Layer w10: USB转串口.3 1885,2690 2070,2875 2225,2875 P1.11
  Bottom Layer w20: P1.11 MCU?.11
P32: DS18B20.2 MCU?.12 P1.12 R43.1 S1.1 S2.1 S3.1 S4.1 | length 6068.1
  Top Layer w10: DS18B20.2 1560,1365 1535,1365 R43.1 1425,1725 1525,1825 1600,1825 1750,1975 2120,1975 2150,2005 2150,2625 2225,2700 P1.12 ; MCU?.12 2800,2500 2800,2080 3030,1850 3500,1850 3600,1950 3600,2250 3690,2340 S3.1
  Bottom Layer w10: S1.1 3750,1750.9 3750,2125.91 ; S2.1 3750,2125.91 ; S3.1 3775,2525.91 ; S4.1 3775,2730.91 3775,2525.91 ; 3750,2125.91 3775,2150.91 3775,2525.91
  Bottom Layer w20: P1.12 MCU?.12
P33: H1838.1 MCU?.13 P1.13 S5.1 S6.1 S7.1 S8.1 | length 6228.5
  Top Layer w10: H1838.1 1700,1125 1700,1300 1600,1400 1600,1725 1825,1950 2128.28,1950 2175,1996.72 2175,2575 2200,2600 P1.13 ; MCU?.13 2775,2425 2775,2050 3000,1825 3525,1825 3625,1925 3625,2210 3675,2260 4035,2260 v2(4075,2300)
  Bottom Layer w10: S5.1 4075,1775.9 4075,2150.91 ; S6.1 4075,2150.91 ; S7.1 4075,2525.91 ; S8.1 4075,2730.91 4075,2525.91 ; 4075,2150.91 v2(4075,2300) 4075,2525.91
  Bottom Layer w20: P1.13 MCU?.13
P34: MCU?.14 P1.14 S9.1 S10.1 S11.1 S12.1 | length 4094.5
  Top Layer w10: MCU?.14 2750,2350 2750,2025 2975,1800 3550,1800 3800,2050 3800,2100 3825,2125 4230.9,2125 S10.1
  Bottom Layer w10: S9.1 4375,1775.9 4375,2150.91 ; S10.1 4375,2150.91 ; S11.1 4375,2525.91 ; S12.1 4375,2730.91 4375,2525.91 ; 4375,2150.91 4375,2525.91
  Bottom Layer w20: P1.14 MCU?.14
P35: MCU?.15 P1.15 S13.1 S14.1 S15.1 S16.1 | length 4180.6
  Top Layer w10: MCU?.15 2725,2275 2725,2000 2950,1775 3625,1775 3650,1750 4530.9,1750 S13.1
  Bottom Layer w10: S13.1 4675,1775.9 4675,2150.91 ; S14.1 4675,2150.91 ; S15.1 4675,2525.91 ; S16.1 4675,2730.91 4675,2525.91 ; 4675,2150.91 4675,2525.91
  Bottom Layer w20: P1.15 MCU?.15
P36: MCU?.16 P1.16 S4.2 S8.2 S12.2 S16.2 | length 5375.6
  Top Layer w10: MCU?.16 2700,2200 2700,1985 2940,1745 3587.66,1745 3625,1707.66 3625,1655 3655,1625 3900,1625 v2(3975,1550) ; S4.2 3933.07,2750 4233.07,2750 ; S8.2 4233.07,2750 ; S12.2 4533.07,2750 ; S16.2@4767.17,2792.17 4725,2750 4533.07,2750 ; 4233.07,2750 4533.07,2750
  Bottom Layer w10: v2(3975,1550) 4725,1550 4850,1675 4850,2733.07 S16.2
  Bottom Layer w20: P1.16 MCU?.16
P37: MCU?.17 P1.17 S3.2 S7.2 S11.2 S15.2 | length 4763.1
  Top Layer w10: MCU?.17 2675,2125 2675,1975 2930,1720 3092.5,1720 3580,1720 3600,1700 3600,1650 3650,1600 3825,1600 v2(3875,1550) ; S3.2 3933.07,2375 4233.07,2375 ; S7.2 4233.07,2375 ; S11.2 4533.07,2375 ; S15.2@4767.17,2417.17 4725,2375 4533.07,2375 ; 4233.07,2375 4533.07,2375
  Bottom Layer w10: v2(3875,1550) 3900,1550 3975,1625 4650,1625 4700,1675 4700,2373.74 S15.2
  Bottom Layer w20: P1.17 MCU?.17
PEA: MCU?.31 P0.9 | length 638.9
  Bottom Layer w10: MCU?.31 3250,2950 3250,3200 P0.9
PSEN: MCU?.29 P0.11 | length 720.9
  Bottom Layer w10: MCU?.29 3300,2800 3300,3190 3335,3225 P0.11
RST: C1.2 MCU?.9 P1.9 R1.2 | length 1908.9
  Top Layer w10: C1.2 1525,2075 1725,2275 1725,2450 v3(1700,2475) ; v2(1975,2875) 2025,2925 2225,2925 P1.9
  Top Layer w20: R1.2 C1.2
  Bottom Layer w10: v3(1700,2475) 1700,2600 v2(1975,2875)
  Bottom Layer w20: P1.9 MCU?.9
SPK: R21.1 蜂鸣器.1@3400,1650 | length 1228.6
  Top Layer w10: R21.1 2500,1375 3250,1375 v2(3300,1425)
  Bottom Layer w10: v2(3300,1425) 3300,1550 蜂鸣器.1@3400,1650
VCC: 1N5918.2 "R S T.2" AT24C04.8 C1.1 C4.1 C5.1 C6.2 C10.1 D2.1 DS18B20.3 H1838.3 JSM.1 LCD1602.2 LCD1602.15 LED跳线.1 MCU?.40 Power.4 Power.5 Power.6 Q2.1 Q4.1 R4.2 R43.2 R44.2 R45.2 USB.1 USB转串口.16 亮度调整.2 | length 12592.7
  Top Layer w10: 2025,3100 2015,3090 2015,3050 v2(2050,3015)
  Top Layer w20: C5.1 1500,3600 1425,3675 1425,4700 1500,4775 R45.2 R44.2 2450,4850 2675,4850 LCD1602.2
  Top Layer w30: Power.6 1335,1775 1375,1815 1375,2035 C1.1 1650,2310 R4.2 ; H1838.3 1550,1065 1600,1015 2290,1015 LED跳线.1 2350,1200 2275,1275 Q2.1
  Top Layer w50: C10.1 1475,2375 ; USB.1 1300,2700 1300,2500 1250,2450 1250,2375 1475,2375 ; R4.2 1475,2375 ; C5.1 C4.1 2150,3600 ; JSM.1 3850,4425 4050,4625 LCD1602.15
  Top Layer w75: USB.1 1N5918.2 2025,3100 2150,3225 2150,3600 2150,3850 2275,3975 2590,3975 2765,3800 MCU?.40 3200,4170 3455,4425 JSM.1
  Bottom Layer w10: R43.2 H1838.3 ; v2(2050,3015) 2050,2980 2071,2959 2071,2804 v2(2075,2800)
  Bottom Layer w30: H1838.3 DS18B20.3 C6.2 D2.1 ; LCD1602.2 2750,4550 2775,4525 Q4.1
  Bottom Layer w50: Power.4 Power.5 Power.6 1300,1775 1375,1700 D2.1
pads on no net: "R S T.3" "R S T.4" ?.0 S1.3 S1.4 S2.3 S2.4 S3.3 S3.4 S4.3 S4.4 S5.3 S5.4 S6.3 S6.4 S7.3 S7.4 S8.3 S8.4 S9.3 S9.4 S10.3 S10.4 S11.3 S11.4 S12.3 S12.4 S13.3 S13.4 S14.3 S14.4 S15.3 S15.4 S16.3 S16.4 USB. USB转串口.9 USB转串口.10 USB转串口.11 USB转串口.12 USB转串口.13 USB转串口.14 USB转串口.15 蜂鸣器.3@2000,1075
copper on no net:
  other v1: 1181.1,1081.1 4724.41,1081.1 1112.1,1109.1 4655.41,1109.1 1255.1,1118.1 4798.41,1118.1 1081.1,1181.1 1281.1,1181.1 4624.41,1181.1 4824.41,1181.1 1262.1,1244.1 4805.41,1244.1 1106.1,1246.1 4649.41,1246.1 1181.1,1281.1 4724.41,1281.1 1181.1,4624.41 4724.41,4624.41 1112.1,4652.41 4655.41,4652.41 1255.1,4661.41 4798.41,4661.41 1081.1,4724.41 1281.1,4724.41 4624.41,4724.41 4824.41,4724.41 1262.1,4787.41 4805.41,4787.41 1106.1,4789.41 4649.41,4789.41 1181.1,4824.41 4724.41,4824.41

## Other copper
Top Layer:
  region net 3V3: 1800,2653 1834,2651 1834,2629 1800,2627
  region net GND: 1818,2778
  region net GND: 1804,2803 1823,2799 1823,2781 1804,2777

## Silkscreen, mask and mechanical layers (free items; w line width, h text height)
Top Overlay:
  drawing of 6301 lines, arcs and shapes, not listed
  text "1K" at 3655,3280 h60 r90
  text "89C52" at 1145,1320 h60 r90
  text "开关" at 3750,1300 h60
  text "LED" at 3475,1225 h60
  text "1-4" at 4200,1175 h60 r90
  text "5-8" at 4300,1175 h60 r90
  text "9-12" at 4400,1150 h60 r90
  text "Development Board" at 1045,1145 h60 r90
  text "7  5  3  1" at 3440,1140 h60
  text "13-16" at 4510,1115 h60 r90
  text "6  4  2  0" at 3515,1065 h60
Mechanical 1:
  lines w10: 4921.26,4921.26 4921.26,985 985,985 985,4921.26 4921.26,4921.26 ; 4921.26,4921.26 4921.26,4921.26

## Text inside footprints (layer, text, board x,y; h text height)
4位LED: Top Overlay "1" at 4840,3745 h60 r270; Top Overlay "a" at 4840,3645 h60 r270; Top Overlay "f" at 4840,3545 h60 r270; Top Overlay "2" at 4840,3445 h60 r270; Top Overlay "3" at 4840,3345 h60 r270; Top Overlay "b" at 4840,3245 h60 r270; Top Overlay "4" at 4300,3245 h60 r270; Top Overlay "g" at 4320,3345 h60 r270; Top Overlay "c" at 4300,3445 h60 r270; Top Overlay "h" at 4300,3545 h60 r270; Top Overlay "d" at 4300,3645 h60 r270; Top Overlay "e" at 4300,3765 h60 r270
Q1: Top Overlay "3" at 1680,3865 h59.05; Top Overlay "1" at 1690,3680 h59.05
Q2: Top Overlay "3" at 2110,1630 h59.05 r90; Top Overlay "1" at 2295,1640 h59.05 r90
Q3: Top Overlay "3" at 1380,3865 h59.05; Top Overlay "1" at 1390,3680 h59.05
Q4: Top Overlay "3" at 2610,4480 h59.05 r90; Top Overlay "1" at 2795,4490 h59.05 r90
Q10: Top Overlay "3" at 4590,4135 h59.05 r180; Top Overlay "1" at 4580,4320 h59.05 r180
Q11: Top Overlay "3" at 4325,4135 h59.05 r180; Top Overlay "1" at 4315,4320 h59.05 r180
Q12: Top Overlay "3" at 4060,4135 h59.05 r180; Top Overlay "1" at 4050,4320 h59.05 r180
Q13: Top Overlay "3" at 3795,4135 h59.05 r180; Top Overlay "1" at 3785,4320 h59.05 r180